# EAGLE board IntegratedSensor (EAGLE 6.3)
MenloSensor1
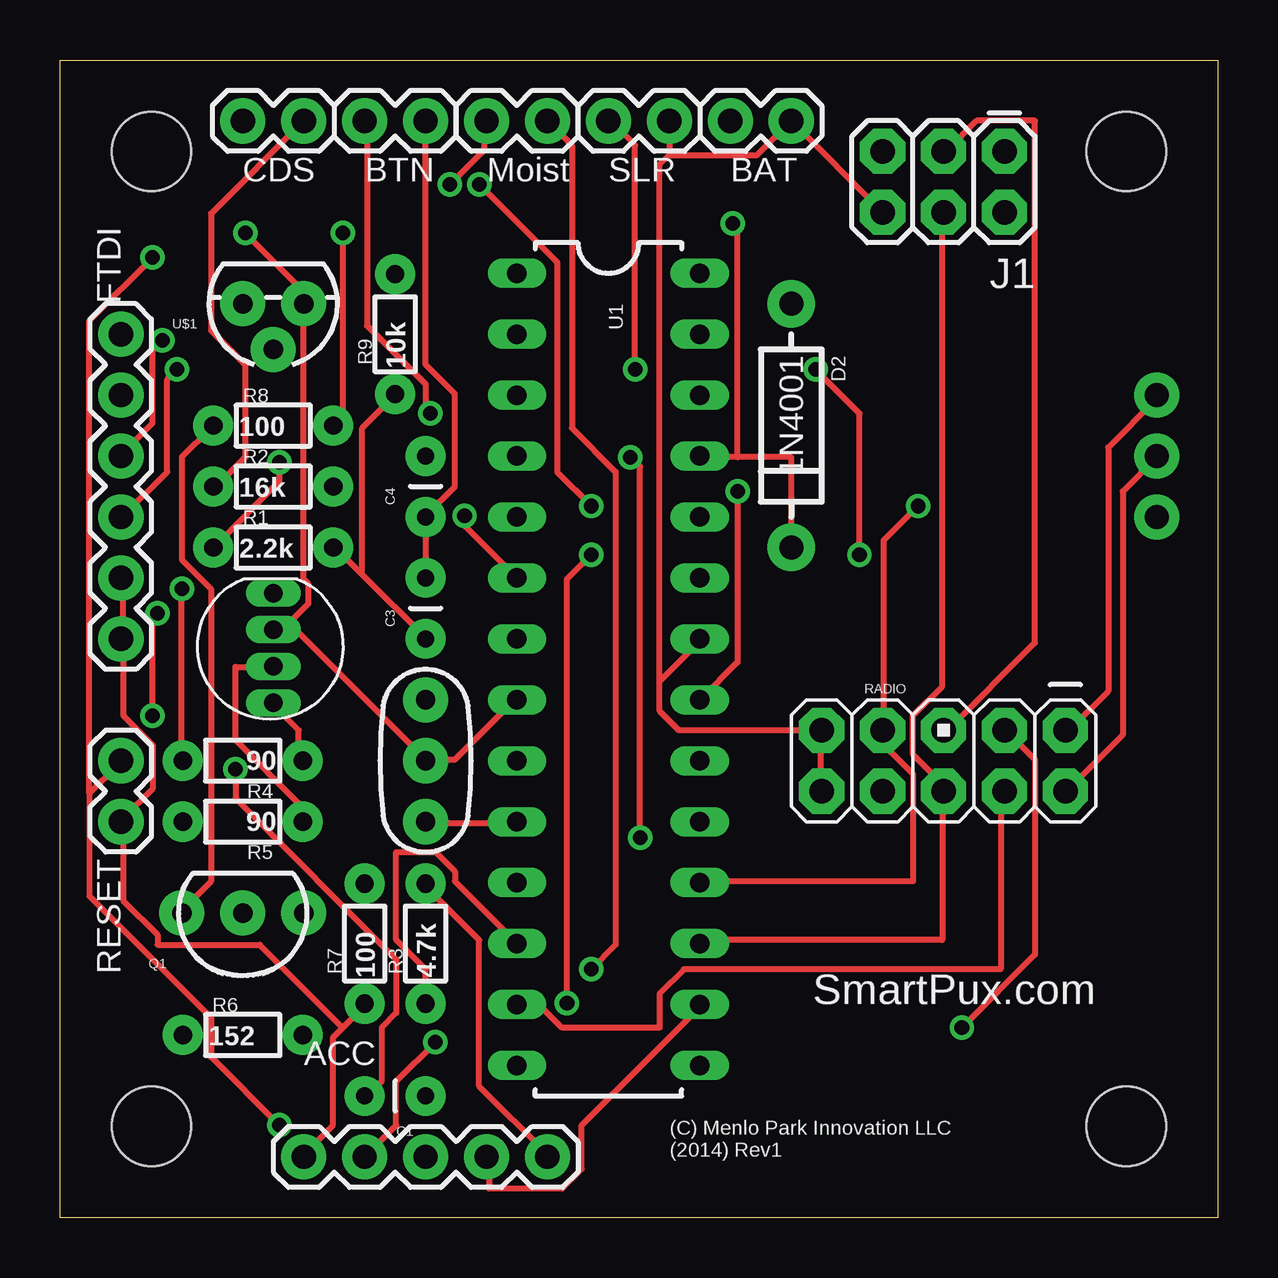
[diagram p0: board, top side]
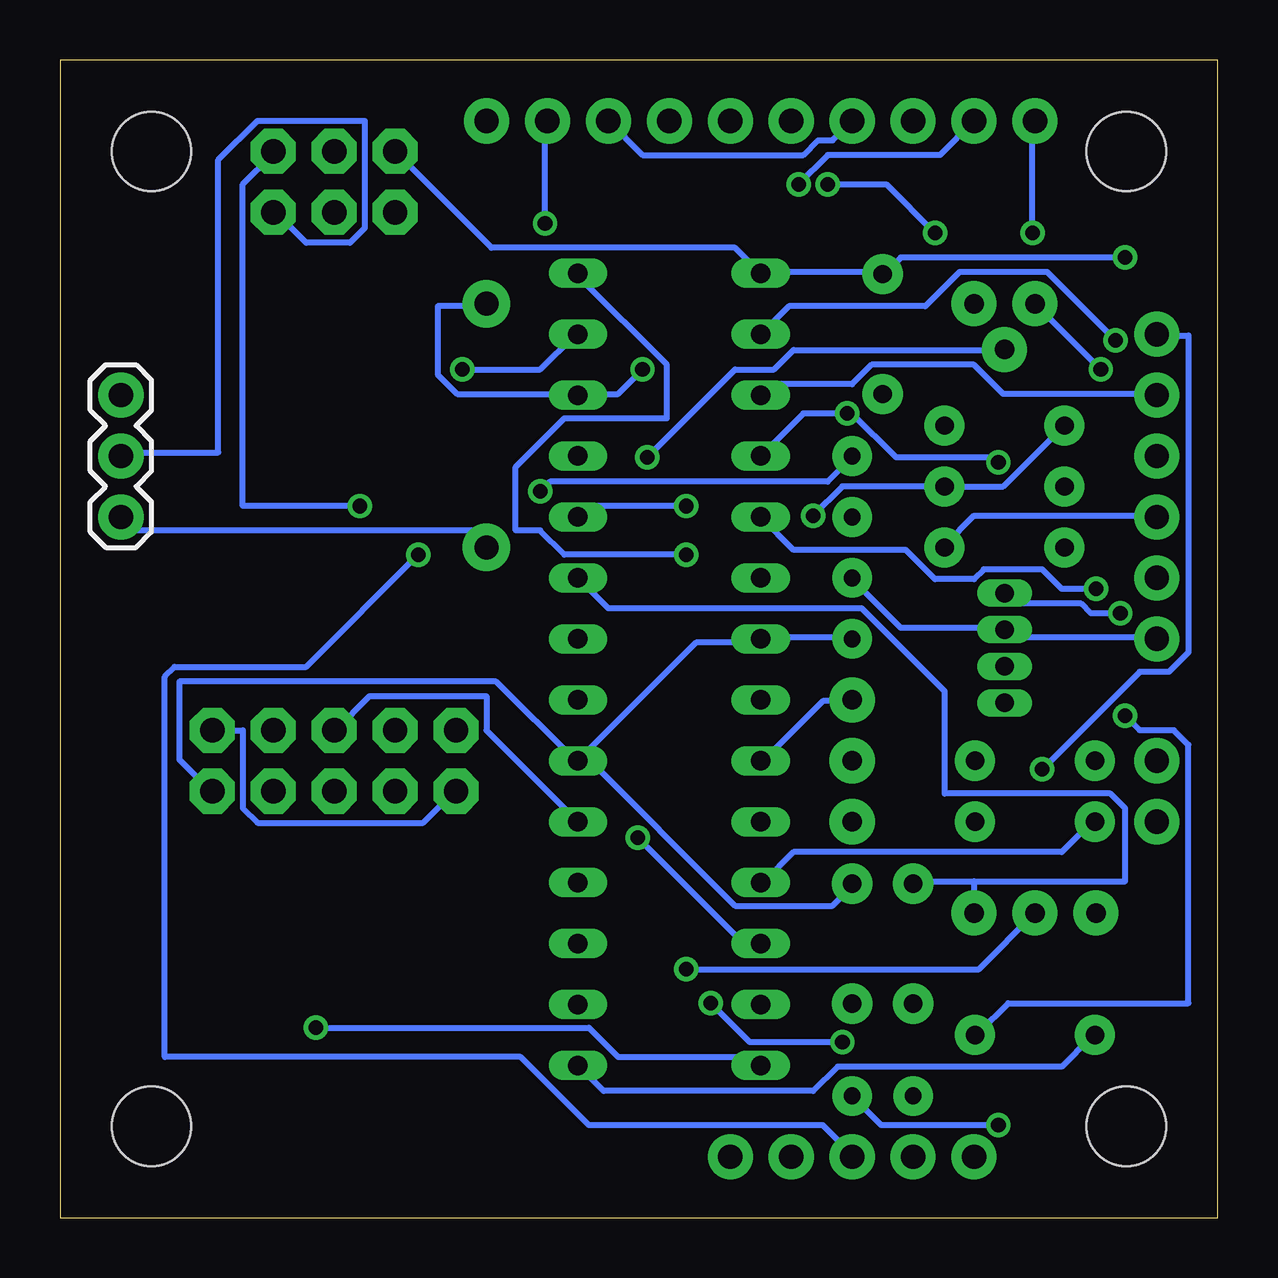
[diagram p1: board, bottom side, seen from below]

Size 48.26 x 48.26 mm. Coordinates in mm from the lower left corner, seen from the top.
Outline: 0,0 0,48.26 48.26,48.26 48.26,0 0,0
Copper layers (1*16): Top 0.035mm / dielectric 1.5mm / Bottom 0.035mm
Design rules "default *": minimum track width 10mil, minimum drill 24mil, track to track 8mil, track to pad 8mil, pad to pad 8mil, via to via 8mil, smd to smd 8mil, copper to edge 40mil, drill to drill 8mil, minimum pad ring 0mil, minimum via ring 8mil, stop-mask expansion 4mil, vias tented up to drill 0mil, thermal gap 10mil

## Footprints (pad centres in the part's own frame; a part is rotated, then mirrored left to right if it is on the bottom)
1X05 = drill 1.016 pad 1.88: 1 0,0; 2 2.54,0; 3 5.08,0; 4 7.62,0; 5 10.16,0
1X02 = drill 1.016 pad 1.88: 1 0,0; 2 2.54,0
CAP-PTH-SMALL = drill 0.7 pad 1.651: 1 0,0; 2 2.54,0
1X03 = drill 1.016 pad 1.88: 1 0,0; 2 2.54,0; 3 5.08,0
LED-RGB-THRU = drill 0.762 pad 0.889 long: 1 1.905,0; 2 0.381,0; 3 -1.143,0; 4 -2.667,0
DIODE-1N4001 = drill 1 pad 1.981: A -5.08,0; C 5.08,0
1X06 = drill 1.016 pad 1.88: 1 0,0; 2 2.54,0; 3 5.08,0; 4 7.62,0; 5 10.16,0; 6 12.7,0
2X3 = drill 1.016 pad 1.88 octagon: 1 0,0; 2 0,2.54; 3 2.54,0; 4 2.54,2.54; 5 5.08,0; 6 5.08,2.54
TO-92-AMMO = drill 0.813 pad 1.88: 1 -2.54,0; 2 0,0; 3 2.54,0
1/6W-RES = drill 0.762 pad 1.676: 1 -2.5,0; 2 2.5,0
AVR_ICSP = drill 1.016 pad 1.88 octagon: 1 -1.27,5.08; 2 1.27,5.08; 3 -1.27,2.54; 4 1.27,2.54; 5 -1.27,0; 6 1.27,0; 7 -1.27,-2.54; 8 1.27,-2.54; 9 -1.27,-5.08; 10 1.27,-5.08
STAND-OFF = hole 3.302: 0,0
DIL28-3 = drill 0.813 long: 1 -16.51,-3.81; 2 -13.97,-3.81; 3 -11.43,-3.81; 4 -8.89,-3.81; 5 -6.35,-3.81; 6 -3.81,-3.81; 7 -1.27,-3.81; 8 1.27,-3.81; 9 3.81,-3.81; 10 6.35,-3.81; 11 8.89,-3.81; 12 11.43,-3.81; 13 13.97,-3.81; 14 16.51,-3.81; 15 16.51,3.81; 16 13.97,3.81; 17 11.43,3.81; 18 8.89,3.81; 19 6.35,3.81; 20 3.81,3.81; 21 1.27,3.81; 22 -1.27,3.81; 23 -3.81,3.81; 24 -6.35,3.81; 25 -8.89,3.81; 26 -11.43,3.81; 27 -13.97,3.81; 28 -16.51,3.81
TO-92 = drill 0.813 pad 1.88: 1 -1.27,0; 2 0,1.905; 3 1.27,0
RESONATOR-PTH = drill 0.8 pad 1.88: 1 -2.54,0; 2 0,0; 3 2.54,0

## Placement (x,y rotation side)
ACC  [1X05]  10.16,2.54 0 top
BAT  [1X02]  27.94,45.72 0 top
BTN  [1X02]  12.7,45.72 0 top
C1  0.1uf  [CAP-PTH-SMALL]  15.24,5.08 180 top
C3  0.1uf  [CAP-PTH-SMALL]  15.24,24.13 90 top
C4  0.1uf  [CAP-PTH-SMALL]  15.24,29.21 90 top
CDS  [1X02]  7.62,45.72 0 top
CONVERTER  3pin  [1X03]  45.72,29.21 90 bottom
D1  LED-RGB-CC-THRUCLEAR  [LED-RGB-THRU]  8.89,24.13 90 top
D2  1N4001  [DIODE-1N4001]  30.48,33.02 270 top
FTDI  [1X06]  2.54,36.83 270 top
J1  AVR_SPI_PRG_6PTH  [2X3]  39.37,44.45 180 top
MOIST  2pin  [1X02]  20.32,45.72 180 top
Q1  2N2222A  [TO-92-AMMO]  7.62,12.7 180 top
R1  2.2k  [1/6W-RES]  8.89,27.94 0 top
R2  16k  [1/6W-RES]  8.89,30.48 0 top
R3  4.7k  [1/6W-RES]  15.24,11.43 90 top
R4  90  [1/6W-RES]  7.62,19.05 180 top
R5  90  [1/6W-RES]  7.62,16.51 180 top
R6  152  [1/6W-RES]  7.62,7.62 0 top
R7  100  [1/6W-RES]  12.7,11.43 90 top
R8  100  [1/6W-RES]  8.89,33.02 0 top
R9  10k  [1/6W-RES]  13.97,36.83 90 top
RADIO  M05X2PTH  [AVR_ICSP]  36.83,19.05 270 top
RESET  0  [1X02]  2.54,19.05 270 top
SLR  [1X02]  22.86,45.72 0 top
STANDOFF1  STAND-OFF  [STAND-OFF]  44.45,44.45 0 top
STANDOFF2  STAND-OFF  [STAND-OFF]  3.81,44.45 0 top
STANDOFF3  STAND-OFF  [STAND-OFF]  3.81,3.81 0 top
STANDOFF4  STAND-OFF  [STAND-OFF]  44.45,3.81 0 top
U1  ATMEGA328P_PDIP  [DIL28-3]  22.86,22.86 270 top
U$1  TEMPERATURE-SENSOR  [TO-92]  8.89,38.1 180 top
Y2  8Mhz  [RESONATOR-PTH]  15.24,19.05 270 top

## Library data of the parts
ACC BAT BTN CDS CONVERTER FTDI J1 MOIST RADIO RESET SLR = SparkFun-Connectors
C1 C3 C4 = SparkFun-Capacitors
D1 = SparkFun-LED-MenloFix; PROD_ID: DIO-08418
D2 Q1 = SparkFun-DiscreteSemi
R1-R9 = SparkFun-Resistors
STANDOFF1-STANDOFF4 = SparkFun-Electromechanical
U1 = SparkFun-DigitalIC
U$1 = SparkFun-Sensors; PARTNAME: DS18B20
Y2 = SparkFun-FreqCtrl

## Nets
A0_MOISTUREINPUT: Q1.1 R7.2 U1.23
A1_LIGHTINPUT: CDS.2 R2.1 U1.24
A4_SDA: ACC.3 U1.27
A5_SCL: ACC.2 U1.28
BAT: BAT.1 CONVERTER.1 D2.C U1.25
CE_RADIO: RADIO.3 U1.14
CSN_RADIO: RADIO.4 U1.13
DIO3_BLUE: R4.2 U1.5
DIO4_SENSOR_POWER: Q1.3 R2.2 R8.1 U1.6
DIO5_GREEN: R5.2 U1.11
DIO6_TEMP: R3.1 U1.12 U$1.2
DIO9_RED: R6.1 U1.15
DIO10_SS: ACC.4 U1.16
GND: ACC.1 BAT.2 BTN.2 C3.2 C4.1 CDS.1 CONVERTER.3 D1.2 FTDI.5 FTDI.6 J1.6 R7.1 RADIO.1 RADIO.9 RADIO.10 RESET.2 SLR.2 U1.8 U1.22 U$1.1 Y2.2
IRQ: BTN.1 R1.1 U1.4
MISO: J1.1 RADIO.7 U1.18
MOSI: J1.4 RADIO.6 U1.17
N$1: D1.4 R4.1
N$2: D1.3 R5.1
N$3: D1.1 R6.2
N$5: U1.9 Y2.1
N$6: U1.10 Y2.3
N$8: C4.2 U1.21
PROBE1: MOIST.1 Q1.2
PROBE2: MOIST.2 R8.2
RESET: C1.1 J1.5 R9.2 RESET.1 U1.1
RTS#: C1.2 FTDI.1
RXD: FTDI.3 U1.2
SCK: J1.3 RADIO.5 U1.19
SOLAR_PLUS: D2.A SLR.1 U1.26
TXD: FTDI.2 U1.3
VCC: ACC.5 C3.1 CONVERTER.2 FTDI.4 J1.2 R1.2 R3.2 R9.1 RADIO.2 U1.7 U1.20 U$1.3

## Tracks (layer width: path | path; a pad name or v marks a point on that pad's centre or on a via)
A0_MOISTUREINPUT
  Bottom 0.254: U1.23 25.4,25.4 14.83,25.4 11.38,21.95 11.38,17.68 4.47,17.68 3.86,17.07 3.86,14.02 10.16,14.02 | 10.16,14.02 12.6,14.02 R7.2 | 10.16,14.02 Q1.1
A1_LIGHTINPUT  (via drill 0.61)
  Top 0.254: v22.15,29.67 20.73,31.09 20.73,39.83 v17.48,43.08 | CDS.2 6.3,41.86 6.3,36.98 7.72,35.56 7.72,31.7 6.5,30.48 R2.1
  Bottom 0.254: U1.24 26.21,29.67 v22.15,29.67 | v17.48,43.08 16.26,44.3 11.58,44.3 CDS.2
A4_SDA  (via drill 0.61)
  Top 0.254: v31.5,35.36 33.33,33.53 v33.33,27.64
  Bottom 0.254: v31.5,35.36 28.25,35.36 26.82,36.78 U1.27 | v33.33,27.64 38,22.96 43.48,22.96 43.89,22.55 43.89,6.71 29.06,6.71 26.21,3.86 16.46,3.86 15.24,2.64 ACC.3
A5_SCL  (via drill 0.61)
  Top 0.254: v22.15,27.64 21.13,26.62 v21.13,8.94 | v15.65,7.32 14.02,5.69 14.02,3.86 ACC.2
  Bottom 0.254: v22.15,27.64 27.23,27.64 28.25,28.65 29.26,28.65 29.26,31.29 27.23,33.33 22.96,33.33 22.96,35.56 26.62,39.22 U1.28 | v21.13,8.94 19.51,7.32 v15.65,7.32
BAT  (via drill 0.61)
  Top 0.254: 28.25,31.7 30.48,31.7 D2.C | 28.25,31.7 26.82,31.7 U1.25 | v28.04,41.45 28.25,41.25 28.25,31.7
  Bottom 0.254: v28.04,41.45 28.04,45.72 BAT.1 | CONVERTER.1 45.72,29.06 45.31,28.65 31.09,28.65 30.48,28.04 D2.C
CE_RADIO  (via drill 0.61)
  Top 0.254: v37.59,7.92 40.64,10.97 40.64,19.1 39.42,20.32 RADIO.3
  Bottom 0.254: v37.59,7.92 26.21,7.92 24.99,6.71 19.3,6.71 19.1,6.5 U1.14
CSN_RADIO
  Top 0.254: U1.13 19.1,8.74 20.12,8.74 20.93,7.92 24.99,7.92 24.99,9.35 26.01,10.36 39.22,10.36 39.22,17.68 RADIO.4
DIO3_BLUE  (via drill 0.61)
  Top 0.254: v5.08,26.21 5.08,19.1 R4.2
  Bottom 0.254: U1.5 17.68,27.84 13.01,27.84 11.79,26.62 10.16,26.62 9.75,27.03 7.32,27.03 6.5,26.21 v5.08,26.21
DIO4_SENSOR_POWER  (via drill 0.61)
  Top 0.254: U1.6 16.87,28.85 v16.87,29.26 | Q1.3 5.08,12.8 6.3,14.02 6.3,26.21 5.08,27.43 5.08,31.7 6.3,32.92 R8.1
  Bottom 0.254: v16.87,29.26 15.65,30.48 R2.2 8.94,30.48 6.5,32.92 R8.1
DIO5_GREEN
  Bottom 0.254: U1.11 18.9,14.02 17.68,15.24 6.5,15.24 5.28,16.46 R5.2
DIO6_TEMP  (via drill 0.61)
  Top 0.254: U1.12 16.46,14.02 16.46,14.43 15.65,15.24 14.02,15.24 14.02,11.58 15.24,10.36 R3.1 | v23.77,31.7 24.18,31.29 v24.18,15.85
  Bottom 0.254: v23.77,31.7 20.12,35.36 18.49,35.36 17.68,36.17 8.94,36.17 U$1.2 | v24.18,15.85 19.91,11.58 19.1,11.58 U1.12
DIO9_RED
  Bottom 0.254: U1.15 25.6,5.28 16.87,5.28 15.85,6.3 6.5,6.3 5.28,7.52 R6.1
DIO10_SS
  Top 0.254: U1.16 26.62,8.74 21.74,3.86 21.74,2.03 20.93,1.22 17.88,1.22 17.88,2.44 ACC.4
GND  (via drill 0.61)
  Top 0.254: J1.6 BAT.2 29.06,44.3 25.4,44.3 | SLR.2 25.4,44.3 | 24.99,22.35 26.62,23.98 U1.22 | 24.99,22.35 24.99,21.13 25.81,20.32 31.7,20.32 | 31.7,20.32 31.7,17.88 RADIO.10 | 31.7,20.32 RADIO.9 | RADIO.1 42.06,20.32 43.69,21.95 43.69,32.11 45.72,34.14 CONVERTER.3 | 25.4,44.3 24.99,43.89 24.99,22.35 | 11.79,7.92 11.38,7.52 11.38,3.86 10.16,2.64 ACC.1 | 11.79,7.92 12.6,8.74 R7.1 | 15.24,19.1 16.46,19.1 18.9,21.54 U1.8 | C3.2 C4.1 15.24,29.26 16.46,30.48 16.46,34.34 15.24,35.56 BTN.2 | FTDI.5 2.64,26.62 2.64,24.18 FTDI.6 2.64,23.98 2.64,20.93 3.86,19.71 3.86,17.88 2.64,16.66 RESET.2 2.64,16.46 2.64,13.21 4.06,11.79 4.06,11.38 8.33,11.38 11.79,7.92 | 9.55,24.79 9.35,24.59 8.94,24.59 D1.2 9.55,24.79 | 9.55,24.79 10.36,25.6 10.36,26.42 10.16,26.62 U$1.1 10.16,38.61 v7.72,41.05 | 9.55,24.79 15.24,19.1 | 15.24,19.1 Y2.2
  Bottom 0.254: BTN.2 16.05,44.91 16.66,44.91 17.27,44.3 23.98,44.3 SLR.2 | RADIO.1 40.64,20.32 40.64,17.07 40.03,16.46 33.12,16.46 31.9,17.68 RADIO.10 | FTDI.6 2.64,24.18 8.53,24.18 8.74,24.38 D1.2 8.94,24.59 13.21,24.59 15.24,26.62 C3.2 | v7.72,41.05 7.72,45.72 CDS.1
IRQ  (via drill 0.61)
  Top 0.254: v15.44,33.53 15.24,33.73 15.24,34.75 12.8,37.19 12.8,45.72 BTN.1 | v9.14,31.5 9.14,30.68 6.5,28.04 R1.1
  Bottom 0.254: U1.4 17.27,33.53 v15.44,33.53 15.24,33.53 13.41,31.7 9.35,31.7 v9.14,31.5
MISO  (via drill 0.61)
  Top 0.254: 34.34,20.32 34.34,19.71 35.56,18.49 35.56,14.02 26.82,14.02 U1.18 | v35.76,29.67 34.34,28.25 34.34,20.32 | 34.34,20.32 RADIO.7
  Bottom 0.254: v35.76,29.67 40.64,29.67 40.64,43.08 39.42,44.3 J1.1
MOSI
  Top 0.254: U1.17 26.82,11.58 36.78,11.58 36.78,17.68 RADIO.6 36.78,17.88 36.78,18.09 35.56,19.3 35.56,20.93 36.78,22.15 36.78,41.86 J1.4
N$1
  Top 0.254: D1.4 8.94,21.34 9.96,20.32 9.96,19.1 R4.1
N$2
  Top 0.254: D1.3 8.74,22.96 7.32,22.96 7.32,19.91 9.96,17.27 9.96,16.66 R5.1
N$3  (via drill 0.61)
  Top 0.254: v4.06,25.2 3.86,24.99 v3.86,20.93
  Bottom 0.254: v4.06,25.2 5.28,25.2 5.69,25.6 8.33,25.6 8.74,26.01 D1.1 | v3.86,20.93 3.25,20.32 1.83,20.32 1.22,19.71 1.22,8.94 8.74,8.94 9.96,7.72 R6.2
N$5
  Bottom 0.254: U1.9 18.9,19.1 16.46,21.54 15.24,21.54 Y2.1
N$6
  Top 0.254: U1.10 18.9,16.46 15.24,16.46 Y2.3
N$8  (via drill 0.61)
  Top 0.254: U1.21 28.25,23.16 v28.25,30.28
  Bottom 0.254: v28.25,30.28 27.84,30.68 16.26,30.68 15.24,31.7 C4.2
PROBE1  (via drill 0.61)
  Top 0.254: v22.15,10.36 23.16,11.38 23.16,31.09 21.34,32.92 21.34,44.7 MOIST.1
  Bottom 0.254: Q1.2 9.96,10.36 v22.15,10.36
PROBE2  (via drill 0.61)
  Top 0.254: v11.79,41.05 11.79,33.33 11.58,33.12 R8.2 | v16.26,43.08 17.68,44.5 17.68,45.72 MOIST.2
  Bottom 0.254: v11.79,41.05 13.82,43.08 v16.26,43.08
RESET  (via drill 0.61)
  Top 0.254: v9.14,3.86 6.3,6.71 6.3,8.33 1.22,13.41 1.22,17.68 | 1.22,17.68 2.44,18.9 RESET.1 | v3.86,40.03 1.22,37.39 1.22,17.68
  Bottom 0.254: J1.5 30.28,40.44 20.12,40.44 U1.1 18.9,39.42 14.02,39.42 R9.2 13.82,39.42 13.21,40.03 v3.86,40.03 | C1.1 14.02,3.86 v9.14,3.86
RTS#  (via drill 0.61)
  Top 0.254: v7.32,18.69 7.32,17.48 14.02,10.77 14.02,8.53 13.41,7.92 13.41,5.69 12.8,5.08 C1.2
  Bottom 0.254: v7.32,18.69 3.25,22.76 2.03,22.76 1.22,23.57 1.22,36.78 2.44,36.78 FTDI.1
RXD  (via drill 0.61)
  Top 0.254: v4.27,36.58 3.86,36.17 3.86,33.12 2.64,31.9 FTDI.3
  Bottom 0.254: U1.2 17.88,38 12.19,38 10.77,39.42 7.11,39.42 v4.27,36.58
SCK
  Top 0.254: J1.3 36.98,44.5 38.2,45.72 40.64,45.72 40.64,23.98 36.98,20.32 RADIO.5
  Bottom 0.254: U1.19 30.48,20.32 30.48,21.74 35.36,21.74 36.78,20.32 RADIO.5
SOLAR_PLUS  (via drill 0.61)
  Top 0.254: v23.98,35.36 23.98,44.7 22.96,45.72 SLR.1
  Bottom 0.254: D2.A 30.48,38 32.51,38 32.51,35.15 31.7,34.34 26.82,34.34 U1.26 26.62,34.34 24.99,34.34 v23.98,35.36
TXD
  Bottom 0.254: U1.3 18.9,34.34 18.49,34.75 15.24,34.75 14.43,35.56 10.16,35.56 8.94,34.34 2.64,34.34 FTDI.2
VCC  (via drill 0.61)
  Top 0.254: RADIO.2 42.06,17.88 44.3,20.12 44.3,30.28 45.72,31.7 CONVERTER.2 | R3.2 15.24,13.82 17.48,11.58 17.48,5.49 20.32,2.64 ACC.5 | 12.6,26.82 15.24,24.18 C3.1 | 12.6,26.82 11.58,27.84 R1.2 | 12.6,26.82 12.6,32.92 13.82,34.14 R9.1 | v4.88,35.36 4.47,34.95 4.47,31.09 2.64,29.26 FTDI.4
  Bottom 0.254: J1.2 39.22,41.86 38,40.64 36.17,40.64 35.56,41.25 35.56,45.72 40.03,45.72 41.66,44.09 41.66,31.9 45.72,31.9 CONVERTER.2 | C3.1 15.24,24.18 18.9,24.18 U1.7 19.1,23.98 21.74,23.98 26.42,19.3 | 26.42,19.3 U1.20 | FTDI.4 2.64,29.26 10.16,29.26 11.38,28.04 R1.2 | v4.88,35.36 U$1.3 | 26.42,19.3 20.12,13.01 16.05,13.01 15.24,13.82 R3.2 | 26.62,19.1 U1.20 | RADIO.2 42.06,17.88 43.28,19.1 43.28,22.35 30.07,22.35 26.82,19.1 U1.20

## Text on the board
tPlace: CDS | BTN | Moist | SLR | BAT | FTDI | RESET | SmartPux.com | ACC | (C) Menlo Park Innovation LLC / (2014) Rev1